# Altium PCB PCB1.PcbDoc
Units mm, origin at the board's own origin, x right, y up, seen from the top; angles counter-clockwise.
Board outline 50.27 x 50.25 mm, 2 copper layers (Top Layer, Bottom Layer); 40 components, 30 nets, 175 pads, 126 vias.
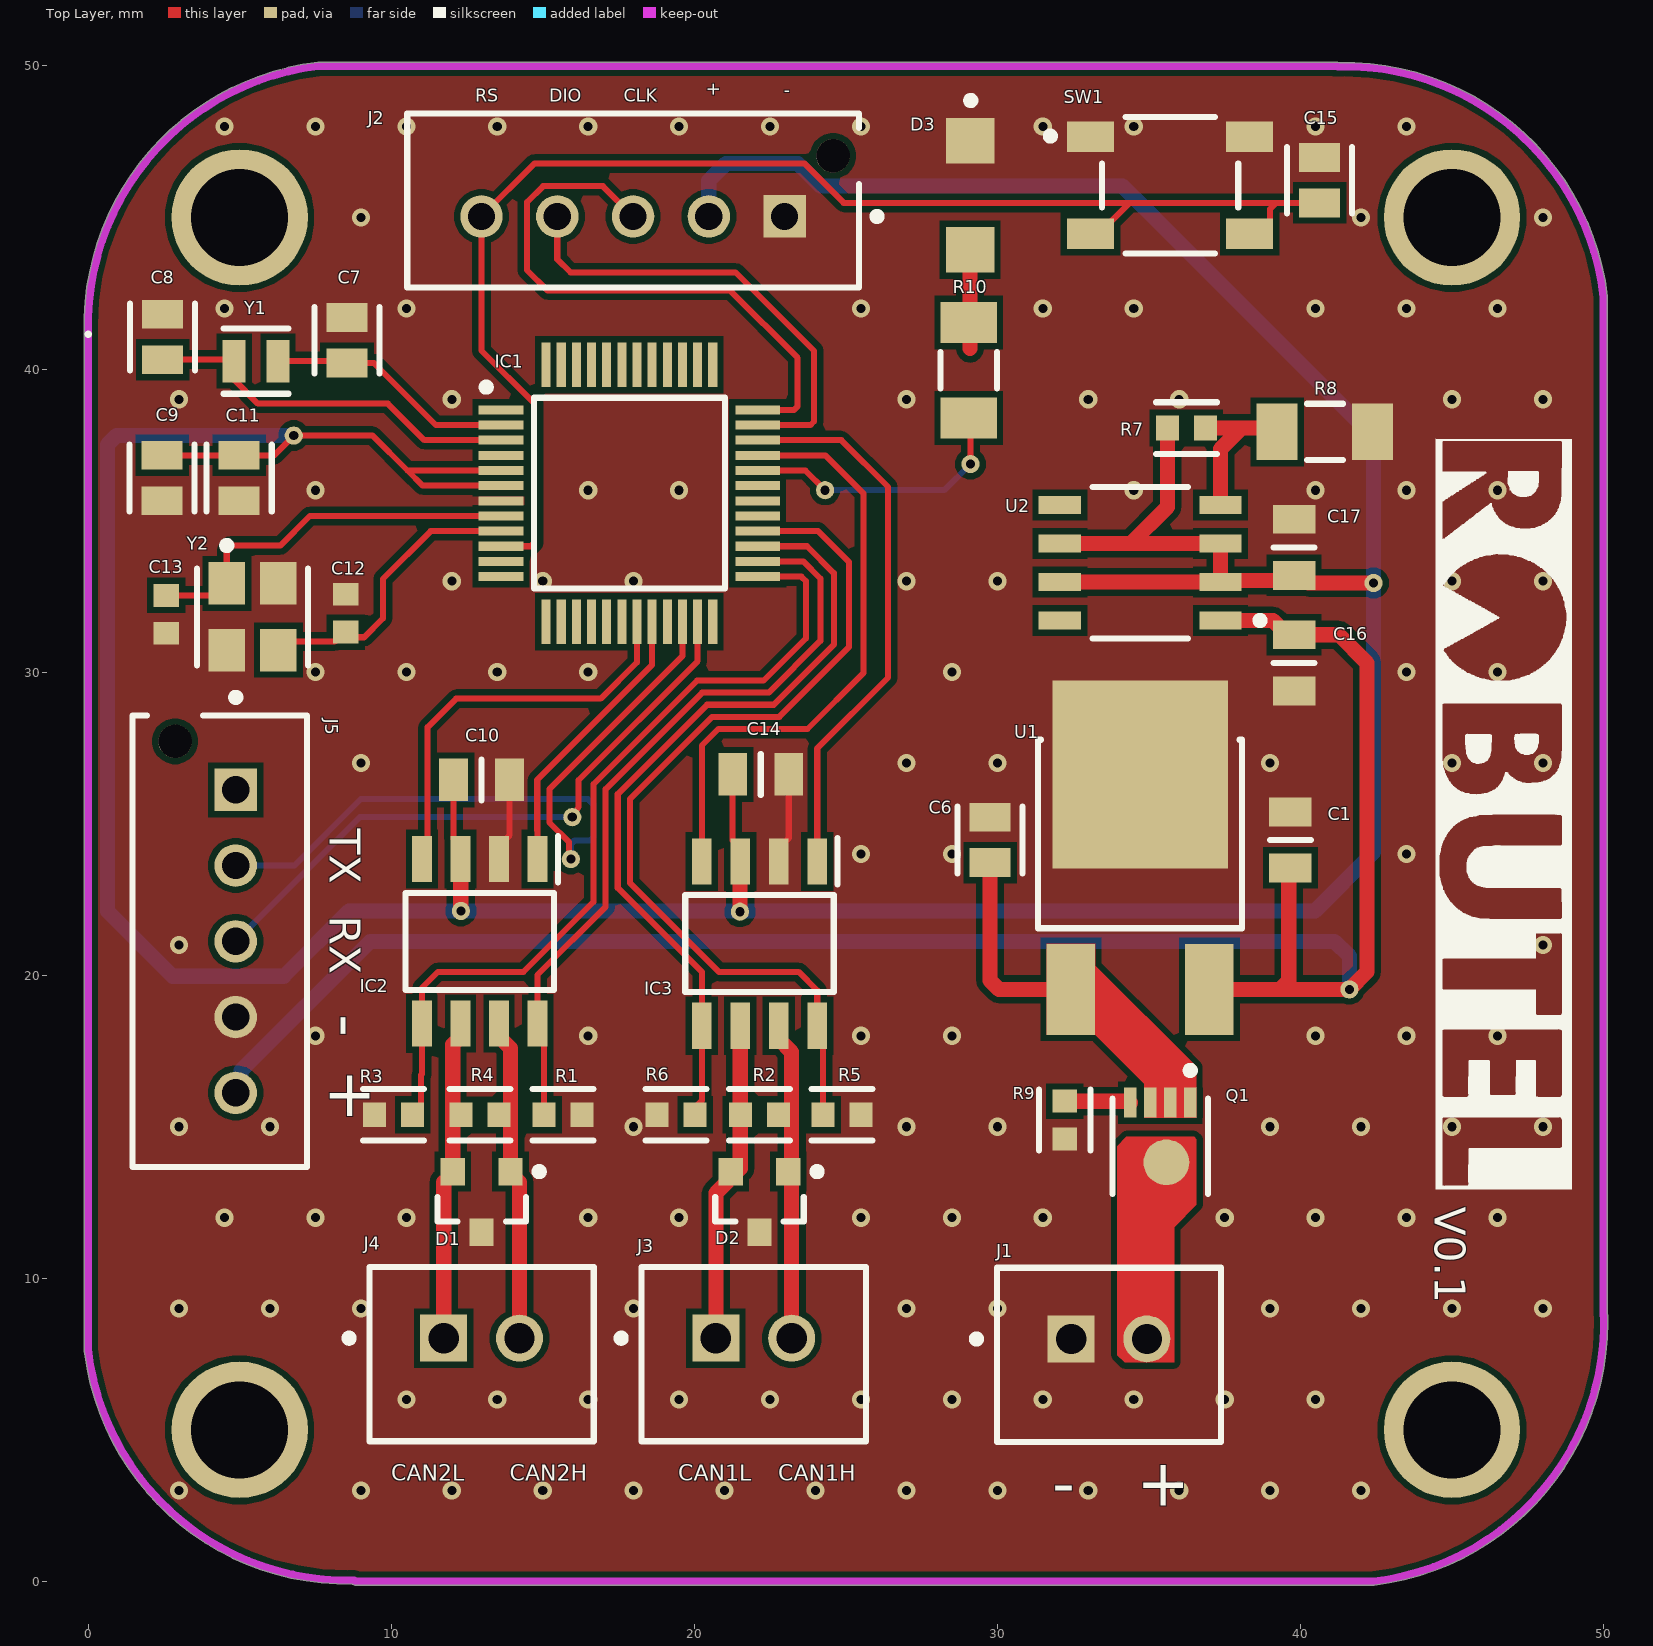
[diagram p0: Top Layer view]
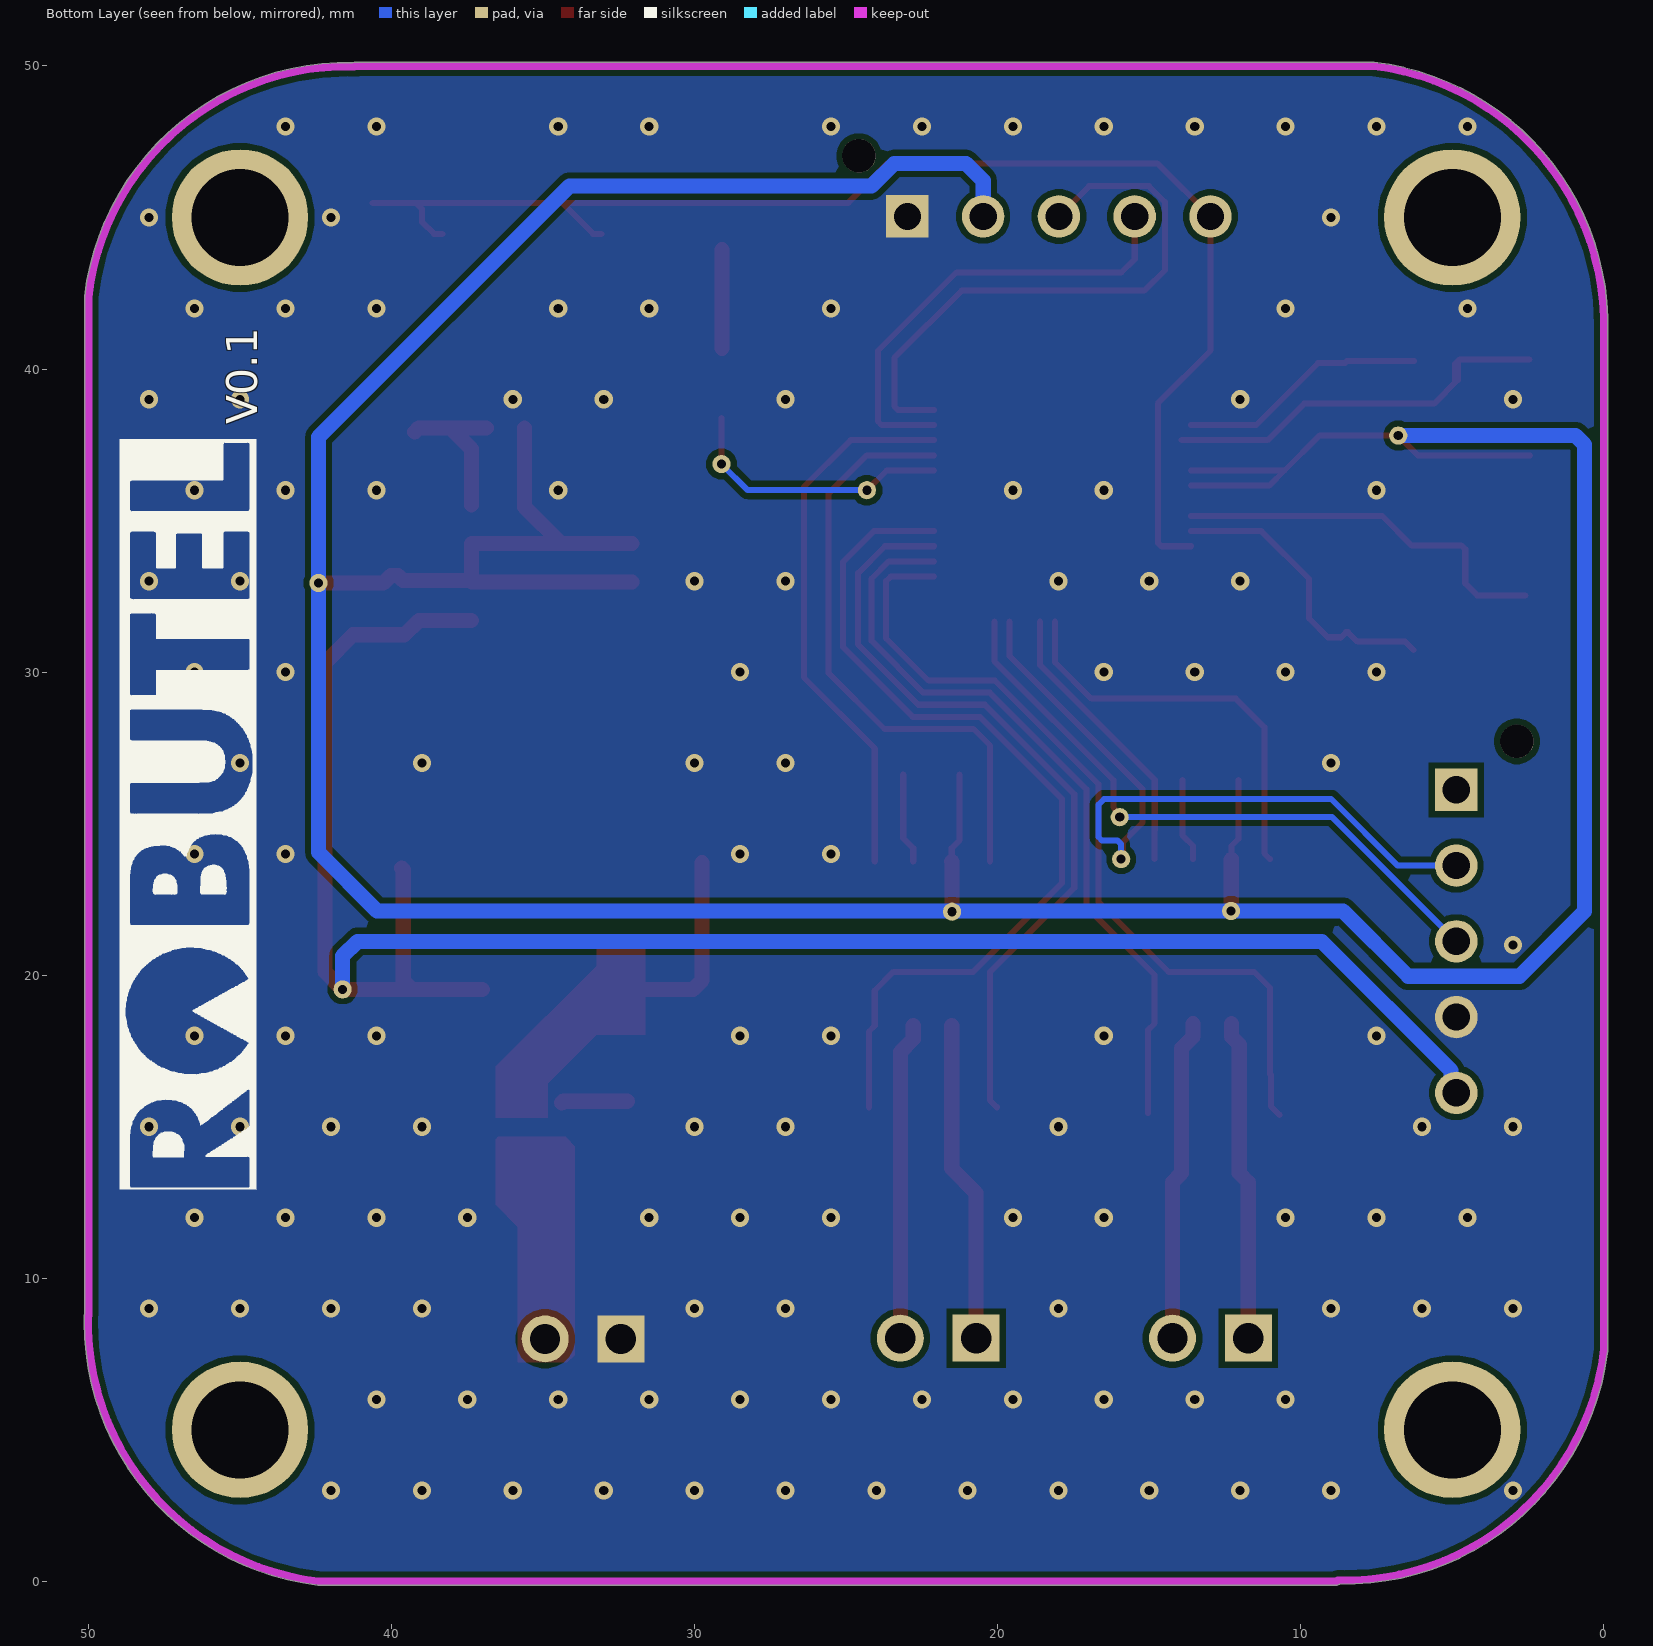
[diagram p1: Bottom Layer view, seen from below]
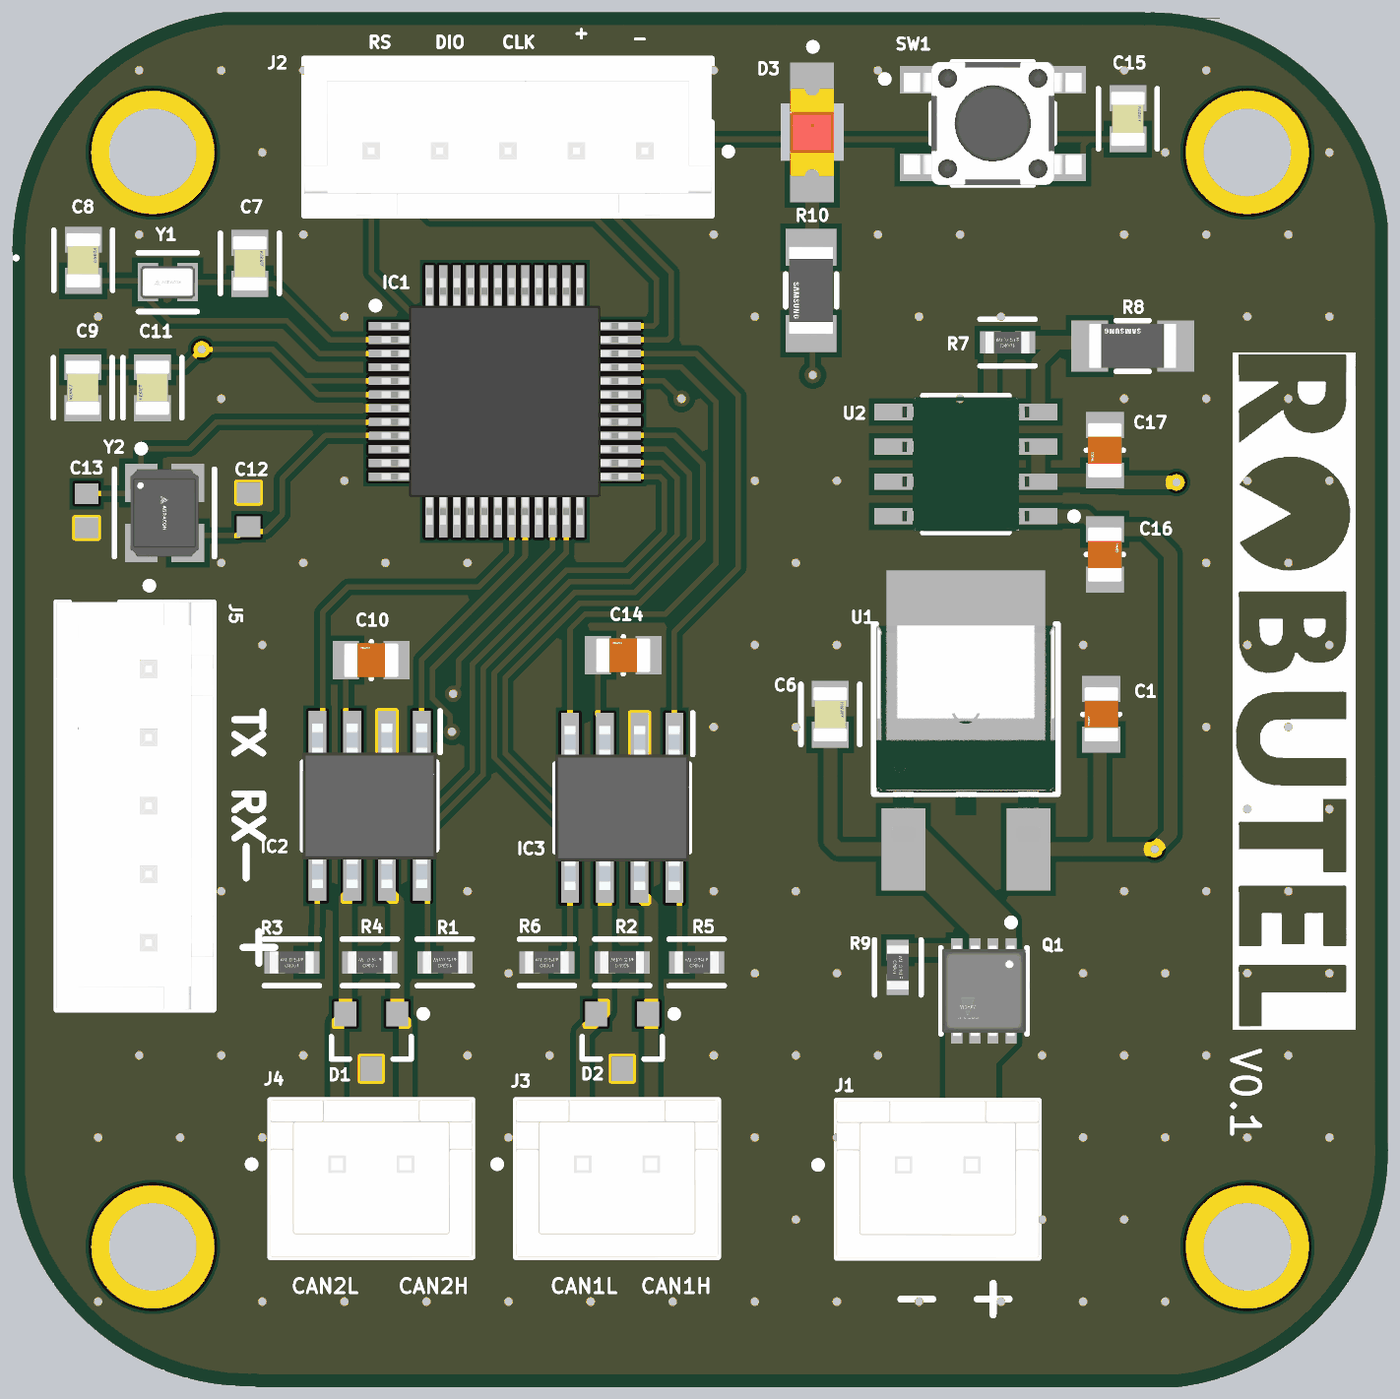
[diagram p2: 3D render of the assembled board from above, using the file's embedded part models]

## Layer stack, top to bottom
Top Solder: solder mask 0.0102, Solder Resist, Dk 3.5
Top Layer: signal copper 0.0356
Dielectric 1: dielectric 0.32, FR-4, Dk 4.8
Bottom Layer: signal copper 0.0356
Bottom Solder: solder mask 0.0102, Solder Resist, Dk 3.5

## Board outline
-0.127,7.58 -0.127,41.144 -0.125,41.218 cw(c8.604,41.449) 7.585,50.121 7.601,50.122 41.227,50.122 41.279,50.111 cw(c41.454,41.38) 50.127,42.4 50.127,42.385 50.127,8.821 50.137,8.777 cw(c41.407,8.546) 50.14,8.546 cw(c41.407,8.546) 42.427,-0.127 42.412,-0.127 8.811,-0.127 8.722,-0.091 cw(c8.546,8.64)

## Design rules (kind name [scope] priority, off if disabled: settings)
Clearance [All] p1: gap=0.2 ignorepadtopadclearanceinfootprint=FALSE
PolygonConnect PolygonConnect_5 [All vs IsNamedPolygon('Bottom Layer-GND 1')] p1: connectstyle=Direct reliefconductorwidth=0.254 reliefentries=4 polygonreliefangle="90 Angle" airgapwidth=0.254
PolygonConnect PolygonConnect_4 [All vs IsNamedPolygon('Top Layer-GND 1')] p2: connectstyle=Direct reliefconductorwidth=0.254 reliefentries=4 polygonreliefangle="90 Angle" airgapwidth=0.254
PolygonConnect PolygonConnect_3 [All vs IsNamedPolygon('Bottom Layer-GND')] p3: connectstyle=Direct reliefconductorwidth=0.254 reliefentries=4 polygonreliefangle="90 Angle" airgapwidth=0.254
PolygonConnect PolygonConnect_2 [All vs IsNamedPolygon('Top Layer-GND')] p4: connectstyle=Direct reliefconductorwidth=0.254 reliefentries=4 polygonreliefangle="90 Angle" airgapwidth=0.254
PolygonConnect PolygonConnect_1 [All vs IsNamedPolygon('Top Layer-GND')] p5: connectstyle=Direct reliefconductorwidth=0.254 reliefentries=4 polygonreliefangle="90 Angle" airgapwidth=0.254
PolygonConnect [All] p6: connectstyle=Relief reliefconductorwidth=0.254 reliefentries=4 polygonreliefangle="90 Angle" airgapwidth=0.254
RoutingVias [All] p1: holewidth=0.711 width=1.27 viastyle="Through Hole" minholewidth=0.711 minwidth=1.27 maxholewidth=0.711 maxwidth=1.27
SolderMaskExpansion [All] p1: expansion=0.102 istentingtop=FALSE
SupplyNets "Schematic Supply Nets_2" [InNet('+5')] p1: voltage=0.000
SupplyNets "Schematic Supply Nets_1" [InNet('GND')] p2: voltage=0.000
SupplyNets "Schematic Supply Nets" [InNet('VDD')] p3: voltage=0.000
Width [All] p1: maxlimit=1 minlimit=0.2 preferedwidth=0.5 minimp=50.000000 maximp=50.000000 favimp=50.000000
30 further rules are at their usual default settings.

## Components (designator, comment, footprint, x,y, rotation, side; value= is the part's Value field where it differs from the comment)
C1 "CC0805KRX7R5BB104" FP-CC0805-EA-MFG 39.666,24.464 r90 top
C6 "C0805C104K5RACTU" FP-C0805C-DN-MFG 29.76,24.464 r270 top value="0.10 μF"
C7 "C0805C519D3HACTU" FP-C0805C-DN-MFG 8.542,40.947 r270 top value="5.1 pF"
C8 "C0805C519D3HACTU" FP-C0805C-DN-MFG 2.456,41.059 r270 top value="5.1 pF"
C9 "C0805C104K5RACTU" FP-C0805C-DN-MFG 2.44,36.402 r90 top value="0.10 μF"
C10 "CC0805KRX7R5BB104" FP-CC0805-EA-MFG 12.983,26.443 r0 top
C11 "C0805C104K5RACTU" FP-C0805C-DN-MFG 4.985,36.402 r90 top value="0.10 μF"
C12 "GRM1885C1H100JA01D" CAPC1608X90X35LL10T15 8.5,31.946 r270 top
C13 "GRM1885C1H100JA01D" CAPC1608X90X35LL10T15 2.58,31.906 r90 top
C14 "CC0805KRX7R5BB104" FP-CC0805-EA-MFG 22.193,26.623 r0 top
C15 "C0805C104K5RACTU" FP-C0805C-DN-MFG 40.633,46.231 r270 top value="0.10 μF"
C16 "CC0805KRX7R5BB104" FP-CC0805-EA-MFG 39.793,30.306 r270 top
C17 "CC0805KRX7R5BB104" FP-CC0805-EA-MFG 39.793,34.116 r90 top
D1 "SZMMBZ27VCLT1G" ONSC-SOT-23-3-318-08_V 12.983,12.518 r270 top
D2 "SZMMBZ27VCLT1G" ONSC-SOT-23-3-318-08_V 22.153,12.518 r270 top
D3 "LTST-C230EKT" FP-LTST-C230EKT-MFG 29.098,45.735 r270 top
IC1 "STM32G0B1CBT6TR" QFP50P900X900X160-48N 17.86,35.902 r0 top
IC2 "TCAN3414DR" SOIC127P600X175-8N 12.921,21.117 r270 top
IC3 "TCAN3414DR" SOIC127P600X175-8N 22.153,21.043 r270 top
J1 "B2B-XH-A(LF)(SN)" FP-B2B-XH-A_LF_SN-MFG 33.686,7.473 r0 top
J2 "B5B-XH-AM(LF)(SN)" FP-B5B-XH-AM_LF_SN-MFG 17.98,45.56 r0 top
J3 "B2B-XH-A(LF)(SN)" FP-B2B-XH-A_LF_SN-MFG 21.963,7.498 r0 top
J4 "B2B-XH-A(LF)(SN)" FP-B2B-XH-A_LF_SN-MFG 12.983,7.498 r0 top
J5 "B5B-XH-AM(LF)(SN)" FP-B5B-XH-AM_LF_SN-MFG 4.346,21.117 r90 top
Q1 "SI7113ADN-T1-GE3" FP-S16-2667-SINGLE-MFG 35.375,14.358 r270 top
R1 "CRGCQ0603J10K" FP-CRGCQ0603-IPC_C 15.67,15.396 r180 top value=10KΩ
R2 "CRGCQ0603F120R" FP-CRGCQ0603-IPC_C 22.153,15.396 r180 top value=120Ω
R3 "CRGCQ0603J10K" FP-CRGCQ0603-IPC_C 10.081,15.396 r180 top value=10KΩ
R4 "CRGCQ0603F120R" FP-CRGCQ0603-IPC_C 12.931,15.396 r180 top value=120Ω
R5 "CRGCQ0603J10K" FP-CRGCQ0603-IPC_C 24.874,15.396 r180 top value=10KΩ
R6 "CRGCQ0603J10K" FP-CRGCQ0603-IPC_C 19.402,15.396 r180 top value=10KΩ
R7 "CRGCQ0603F1K2" FP-CRGCQ0603-IPC_C 36.237,38.053 r180 top value=1.2KΩ
R8 "RC3216J202CS" FP-RC3216-IPC_A 40.809,37.926 r180 top
R9 "CRGCQ0603F1K2" FP-CRGCQ0603-IPC_C 32.226,15.216 r90 top value=1.2KΩ
R10 "RC3216J202CS" FP-RC3216-IPC_A 29.056,39.959 r270 top
SW1 "PTS647SK38SMTR2LFS" FP-PTS647SK38SMTR2LFS-MFG 35.698,46.06 r0 top
U1 "MC7805CDTRKG" FP-369C-MFG 34.713,23.833 r0 top
U2 "LM317LD13TR" FP-SO-8-0016023-MFG 34.713,33.608 r180 top
Y1 "ABS06-32.768KHZ-9-1-T" FP-ABS06-MFG 5.542,40.259 r0 top
Y2 "ABM8G-24.000MHZ-B4Y-T" FP-ABM8G-MFG 5.425,31.826 r270 top

## Footprints (in the part's own frame and the unit in brackets; to place one, negate y for a bottom-side part, rotate by r counter-clockwise, add the part's x,y. Pads: shape width x height; smd on the part's side, far side on the other; paste and mask are expansions set on the pad)
CAPC1608X90X35LL10T15 [mm] "Chip Capacitor, 2-Leads, Body 1.60x0.80mm, IPC High Density"
  rect 0.75x0.85 smd: 1(-0.625,0) 2(0.625,0)
  body extent -0.85,-0.45 0.85,0.45, height 0.9
FP-369C-MFG [mm]
  rect 1.6x3 smd paste+0 mask+0: 1(-2.285,-4.3) 3(2.285,-4.3)
  rect 5.8x6.2 smd paste+0 mask+0: 4(0,2.79)
  silkscreen extent -3.36,-2.28 3.36,3.94, body extent -3.46,-5.9 3.46,5.99, height 0.25
FP-ABM8G-MFG [mm]
  rect 1.4x1.2 smd paste+0 mask+0: 1(-1.1,-0.85) 2(1.1,-0.85) 3(1.1,0.85) 4(-1.1,0.85)
  silkscreen extent -2.47,-1.83 1.6,1.83, body extent -1.9,-1.55 1.9,1.55, height 0.25
FP-ABS06-MFG [mm]
  rect 0.75x1.4 smd paste+0 mask+0: 1(-0.725,0) 2(0.725,0)
  silkscreen extent -1.07,-1.07 1.07,1.07, body extent -1.2,-0.8 1.2,0.8, height 0.25
FP-B2B-XH-A_LF_SN-MFG [mm]
  rect 1.55x1.55 hole 1 paste-2539.97 mask+0: 1(-1.25,0.525)
  round 1.55 hole 1 paste-2539.97 mask+0: 2(1.25,0.525)
  silkscreen extent -4.5,-2.88 3.7,2.88, body extent -3.8,-2.98 3.8,2.98, height 0.25
FP-B5B-XH-AM_LF_SN-MFG [mm]
  rect 1.4x1.4 hole 0.9 paste-2539.97 mask+0: 1(5,-0.525)
  round 1.4 hole 0.9 paste-2539.97 mask+0: 2(2.5,-0.525) 3(0,-0.525) 4(-2.5,-0.525) 5(-5,-0.525)
  round 1.1 hole 1.1 unplated paste-2539.97 mask+0: ""(6.6,1.475)
  silkscreen extent -7.45,-2.88 8.18,2.88, body extent -7.55,-2.98 7.55,2.98, height 0.25
FP-C0805C-DN-MFG [mm]
  rect 0.95x1.35 smd paste+0 mask+0: 1(-0.75,0) 2(0.75,0)
  silkscreen extent -1.1,-1.07 1.1,1.07, body extent -1.4,-0.85 1.4,0.85, height 0.25
FP-CC0805-EA-MFG [mm]
  rect 0.95x1.4 smd paste+0 mask+0: 1(-0.925,0) 2(0.925,0)
  silkscreen extent 0,-0.67 0,0.67, body extent -1.73,-1.17 1.73,1.17, height 0.25
FP-CRGCQ0603-IPC_C [mm]
  rect 0.758x0.812 smd paste+0 mask+0: 1(-0.627,0) 2(0.627,0)
  silkscreen extent -1.01,-0.85 1.01,0.85, body extent -0.8,-0.4 0.8,0.4, height 0.55
FP-LTST-C230EKT-MFG [mm]
  rect 1.5x1.6 smd paste+0 mask+0: 1(-1.8,0) 2(1.8,0)
  silkscreen extent -3.25,-0.1 -3,0.15, body extent -2.65,-0.95 2.65,0.95, height 0.25
FP-PTS647SK38SMTR2LFS-MFG [mm]
  rect 1.55x1 smd paste+0 mask+0: 1(-2.625,1.6) 2(2.625,1.6) 3(-2.625,-1.6) 4(2.625,-1.6)
  silkscreen extent -4.07,-2.25 2.25,2.25, body extent -3.5,-2.35 3.5,2.35, height 0.25
FP-RC3216-IPC_A [mm]
  rect 1.355x1.858 smd paste+0 mask+0: 1(-1.576,0) 2(1.576,0)
  silkscreen extent -0.6,-0.93 0.6,0.93, body extent -2.75,-1.43 2.75,1.43, height 0.25
FP-S16-2667-SINGLE-MFG [mil]
  rect 39x16 smd paste+0 mask+0: 1(-56.5,39) 2(-56.5,13) 3(-56.5,-13) 4(-56.5,-39)
  round 59.4 smd paste+0 mask+0: 5-6-7-8(21,8)
  Top Layer region: -12,44 46,44 46,47 76,47 76,31 56,31 56,21 76,21 76,5 56,5 56,-5 76,-5 76,-21 56,-21 56,-31 76,-31 76,-47 46,-47 46,-44 -12,-44
  silkscreen extent -103,-62 62,62, body extent -80,-71 80,71, height 10
FP-SO-8-0016023-MFG [mm]
  rect 1.4x0.6 smd paste+0 mask+0: 1(-2.65,1.905) 2(-2.65,0.635) 3(-2.65,-0.635) 4(-2.65,-1.905) 5(2.65,-1.905) 6(2.65,-0.635) 7(2.65,0.635) 8(2.65,1.905)
  silkscreen extent -4.08,-2.5 1.58,2.5, body extent -3.45,-2.6 3.45,2.6, height 0.25
ONSC-SOT-23-3-318-08_V [mm] "SOT23, 3-Leads, Body 2.92x1.3mm, Pitch 0.95mm"
  rect 0.9x0.8 smd: 1(-1,0.95) 2(-1,-0.95) 3(1,0)
  silkscreen extent -1.12,-1.46 0.65,2.03, body extent -0.65,-1.46 0.65,1.46, height 1.11
QFP50P900X900X160-48N [mm]
  rect 1.475x0.3 smd: 1(-4.238,2.75) 2(-4.238,2.25) 3(-4.238,1.75) 4(-4.238,1.25) 5(-4.238,0.75) 6(-4.238,0.25) 7(-4.238,-0.25) 8(-4.238,-0.75) 9(-4.238,-1.25) 10(-4.238,-1.75) 11(-4.238,-2.25) 12(-4.238,-2.75) 25(4.238,-2.75) 26(4.238,-2.25) 27(4.238,-1.75) 28(4.238,-1.25) 29(4.238,-0.75) 30(4.238,-0.25) 31(4.238,0.25) 32(4.238,0.75) 33(4.238,1.25) 34(4.238,1.75) 35(4.238,2.25) 36(4.238,2.75)
  rect 0.3x1.475 smd: 13(-2.75,-4.238) 14(-2.25,-4.238) 15(-1.75,-4.238) 16(-1.25,-4.238) 17(-0.75,-4.238) 18(-0.25,-4.238) 19(0.25,-4.238) 20(0.75,-4.238) 21(1.25,-4.238) 22(1.75,-4.238) 23(2.25,-4.238) 24(2.75,-4.238) 37(2.75,4.238) 38(2.25,4.238) 39(1.75,4.238) 40(1.25,4.238) 41(0.75,4.238) 42(0.25,4.238) 43(-0.25,4.238) 44(-0.75,4.238) 45(-1.25,4.238) 46(-1.75,4.238) 47(-2.25,4.238) 48(-2.75,4.238)
  silkscreen extent -4.85,-3.15 3.15,3.62, body extent -4.5,-4.5 4.5,4.5, height 1.41
SOIC127P600X175-8N [mm]
  rect 1.525x0.65 smd: 1(-2.712,1.905) 2(-2.712,0.635) 3(-2.712,-0.635) 4(-2.712,-1.905) 5(2.712,-1.905) 6(2.712,-0.635) 7(2.712,0.635) 8(2.712,1.905)
  silkscreen extent -3.47,-2.45 1.6,2.58, body extent -3,-2.45 3,2.45, height 1.75

## Part data
C1 C10 C14 C16 C17: library part CMP-03422-000810-2, "CAP CER X7R 0805", RoHS Compliant=Yes
C6 C9 C11 C15: library part CMP-2007-00279-2, "CAP CER 0.1UF 50V X7R 0805", Capacitance="0.10 μF", Manufacturer=KEMET, Package=C0805C-DN, Temperature="-55°C to +125°C", Temperature Characteristic=X7R, Temperature Coefficient=30ppm/°C, Temperature Range High=+125°C, Temperature Range Low=-55°C, Tolerance=0.1, Voltage Rating="50 V", Automotive=No, Category=Cap, ComponentLink2Description=Datasheet, ComponentLink2URL=https://content.kemet.com/datasheets/KEM_C1003_C0G_SMD.pdf, Device Class L1="Passive Components", Device Class L2=Capacitors, Device Class L3="Ceramic Capacitors", Digikey Description="CAP CER 0.1UF 50V X7R 0805", Height=0.88mm, Ipc Land Pattern Name=CAPC200125X78, Lead Free=Yes, Manufacturer Part Number=C0805C104K5RACTU, Material=Ceramic, Mouser Description="Cap Ceramic 0.1uF 50V X7R 10% SMD 2.0 x 1.2 mm 125 C Paper T/R", Octopart=https://octopart.com/c0805c104k5ractu-kemet-143926, RoHS=TRUE
C7 C8: library part CMP-03020-033346-1, "C0805 5.1 pF X8R 30ppm/°C 0.5 pF 25 V", Capacitance="5.1 pF", Manufacturer=KEMET, Package=C0805C-DN, Temperature="-55°C to +125°C", Temperature Characteristic=X8R, Temperature Coefficient=30ppm/°C, Temperature Range High=+125°C, Temperature Range Low=-55°C, Tolerance="0.5 pF", Voltage Rating="25 V", Automotive=No, Category=Cap, ComponentLink2Description=Datasheet, ComponentLink2URL=https://content.kemet.com/datasheets/KEM_C1003_C0G_SMD.pdf, Device Class L1="Passive Components", Device Class L2=Capacitors, Device Class L3="Ceramic Capacitors", Height=0.88mm, Ipc Land Pattern Name=CAPC200125X78, Lead Free=Yes, Manufacturer Part Number=C0805C519D3HACTU, Material=Ceramic, Octopart=https://octopart.com/c0805c519d3hactu-kemet-88727353, RoHS=TRUE
C12 C13: library part CMP-2006-02592-1, Manufacturer=Murata, Part Number=GRM1885C1H100JA01D
D1 D2: library part CMP-1060-01002-1, "40 W Peak Power Zener Transient Voltage Suppressor, Dual Common Cathode Zeners for ESD Protection, 3-Pin SOT-23, Pb-Free, Tape and Reel", Manufacturer="On Semiconductor", ComponentLink1Description="Manufacturer URL", ComponentLink1URL=http://www.onsemi.com/, ComponentLink2Description=Datasheet, ComponentLink2URL=http://www.onsemi.cn/pub_link/Collateral/MMBZ15VDLT1-D.PDF, ComponentLink3Description="Package Specification", ComponentLink3URL=http://www.onsemi.cn/pub_link/Collateral/318-08.PDF, DatasheetVersion="Rev. 12", Mounting Technology="Surface Mount", PackageDescription="3-Pin Small Outline Transistor, Body 2.92 x 1.3 mm, Pitch 0.95 mm", PackageReference=SOT-23-3-318-08, PackageVersion="Rev. AP, 11/2009", Packing="Tape and Reel", PartNumber=SZMMBZ27VCLT1G, RoHS=Pb-Free, VZ Typ (V)=27
D3: library part CMP-22017-000030-1, "LED RED CLEAR CHIP SMD", Case Code (Imperial)=1206, Case Code (Metric)=3216, Color=Red, Forward Current=30mA, Forward Voltage=2V, Lens Color=Colorless, Max Operating Temperature=85°C, Min Operating Temperature=-55°C, Package Quantity=1, Power Dissipation=100mW, Reverse Voltage=5V, Test Current=10mA, Case/Package=1206, Depth=1.6mm, Dominant Wavelength=621nm, Height=1.1mm, Illumination Color=Red, Lead Free="Lead Free", Length=3.2mm, Lens Style=Diffused, Lens Transparency=Clear, Luminous Intensity=6mcd, Mount="Surface Mount", Number of Elements=1, Number of LEDs=1, Number of Pins=2, Packaging="Tape and Reel", Power Rating=100mW, Radiation Hardening=No, Viewing Angle=130°, Wavelength=630nm, Width=1.6mm
IC1: "Integrated Circuit", Manufacturer_Name=STMicroelectronics, Mouser Part Number=511-STM32G0B1CBT6TR, Arrow Part Number=STM32G0B1CBT6TR, Arrow Price/Stock=https://www.arrow.com/en/products/stm32g0b1cbt6tr/stmicroelectronics?utm_currency=USD&region=nac, Datasheet Link=https://www.st.com/resource/en/datasheet/stm32g0b1cc.pdf, Height=1.6mm, Manufacturer_Part_Number=STM32G0B1CBT6TR, Mouser Price/Stock=https://www.mouser.co.uk/ProductDetail/STMicroelectronics/STM32G0B1CBT6TR?qs=HoCaDK9Nz5cqFCA6TLpp%252Bw%3D%3D
IC2 IC3: "Integrated Circuit", Manufacturer_Name="Texas Instruments", Mouser Part Number=595-TCAN3414DR, Arrow Part Number=TCAN3414DR, Arrow Price/Stock=https://www.arrow.com/en/products/tcan3414dr/texas-instruments?utm_currency=USD&region=nac, Datasheet Link=https://www.ti.com/lit/ds/symlink/tcan3414.pdf?ts=1713723144569&ref_url=https%253A%252F%252Fwww.mouser.ch%252F, Height=1.75mm, Manufacturer_Part_Number=TCAN3414DR, Mouser Price/Stock=https://www.mouser.co.uk/ProductDetail/Texas-Instruments/TCAN3414DR?qs=mELouGlnn3egF2AojRJddw%3D%3D
J1 J3 J4: library part CMP-2000-05888-3, "CONN HEADER VERT 2POS 2.5MM", Color=Natural, Contact Resistance=20mR, Current Rating=3A, Housing Color=White, Insulation Resistance=1GR, Max Operating Temperature=85°C, Max Voltage Rating (AC)=250V, Min Operating Temperature=-25°C, Connector Type="Male Pin", Contact Material=Brass, Contact Plating=Tin, Contact Type="Male Pin", Depth=5.75mm, Fastening Type=Detent, Housing Material=Polyamide, Lead Free="Lead Free", Lead Pitch=2.5mm, Length=7.4mm, Max Current Rating=3A, Max Voltage Rating (DC)=250V, Mount="Through Hole", Number of Contacts=2, Number of Positions=2, Number of Rows=1, Orientation=Straight, Packaging=Bulk, Pitch=2.5mm, REACH SVHC="No SVHC", Series=XH, Termination=Solder, Voltage Rating=250V, Voltage Rating (AC)=250V, Wire/Cable Gauge=22AWG
J2 J5: library part CMP-17439-000304-1, "CONN HEADER VERT 5POS 2.5MM", Color=Green, Contact Resistance=20mR, Flammability Rating="UL94 V-0", Housing Color=White, Insulation Color=Natural, Max Current Rating=3A, Max Operating Temperature=85°C, Max Voltage Rating (AC)=250V, Min Operating Temperature=-25°C, Connector Type=Header, Contact Finish - Mating=TIN, Contact Material=Brass, Contact Plating=Copper, Contact Shape=Square, Contact Type="Male Pin", Depth=5.75mm, Fastening Type=Detent, Housing Material=Polyamide, Insulation Material=Nylon, Lead Free="Lead Free", Length=14.9mm, Mated Stacking Heights=9.8mm, Mount="Through Hole", Number of Positions=5, Number of Rows=1, Orientation=Straight, Packaging=Bulk, Pitch=2.5mm, Series=XH, Termination=Solder, Voltage Rating=250V
Q1: library part CMP-02550-000064-1, "MOSFET P-CH 100V 10.8A 1212-8", Continuous Drain Current=-3.8A, Drain To Source Breakdown Voltage=-100V, Drain To Source Resistance=0.11Ω, Gate To Source Voltage=20V, Input Capacitace At Vds="515pF @ -50V", Manufacturer=Vishay, Max Forward Diode Voltage=-1.2V, Max Junction Temp=+150°C, Package=S16-2667-SINGLE, Power Dissipation=3.5W, Pulse Drain Current=-20A, Temperature="-55°C to +150°C", Temperature Range Low=-55°C, Typ Forward Diode Voltage=-0.8V, Automotive=No, Category=Trans, ComponentLink2Description=Datasheet, ComponentLink2URL=http://www.vishay.com/docs/77678/si7113adn.pdf, Depletion Mode=False, Device Class L1="Discrete Semiconductors", Device Class L2=Transistors, Device Class L3=MOSFETs, Digikey Description="MOSFET P-CH 100V 10.8A 1212-8", Drain To Source Voltage=-100V, Footprint Url=https://www.vishay.com/docs/72597/72597.pdf, Gate Charge At Vgs="10.9nC @ -10V", Height=1.17mm, Lead Free=Yes, Manufacturer Part Number=SI7113ADN-T1-GE3, Number of Channels=1, Number Of P Channels=1, Octopart=https://octopart.com/si7113adn-t1-ge3-vishay-88182558, Reverse Recovery Charge=80nC, Reverse Recovery Time=43ns, RoHS=TRUE, Rthja Max=36°C/W, Standoff Height=0mm, Temperature Range High=+150°C, Threshold Vgs Max=-2.6V, Threshold Vgs Min=-1.1V, Transconductance=8S, Turn Off Delay Time=20ns, Turn On Delay Time=10ns
R1 R3 R5 R6: library part CMP-03211-009884-1, "CRGCQ 0603 10K 5%", Ambient Temperature Range High=+70°C, Manufacturer="TE Connectivity", Package=CRGCQ0603, Power Rating=0.1W, Resistance=10KΩ, Temperature="-55°C to +155°C", Temperature Coefficient=±100ppm/°C, Temperature Range High=+155°C, Temperature Range Low=-55°C, Tolerance=0.05, Voltage Rating=75V, Category=Res, ComponentLink2Description=Datasheet, ComponentLink2URL=https://www.te.com/commerce/DocumentDelivery/DDEController?Action=showdoc&DocId=Data+Sheet%7F1773204-3%7F1%7Fpdf%7FEnglish%7FENG_DS_1773204-3_1.pdf%7F4-2176339-923, Composition="Thick Film", Device Class L1="Passive Components", Device Class L2=Resistors, Device Class L3="Chip SMD Resistors", Digikey Description="CRGCQ 0603 10K 5%", Height=0.55mm, Ipc Land Pattern Name=RESC16080X45, Lead Free=Yes, Manufacturer Part Number=CRGCQ0603J10K, Mouser Description="Res Thick Film 0603 10K Ohm 5% 0.1W(1/10W) ±100ppm/C Pad SMD Automotive T/R", Octopart=https://octopart.com/crgcq0603j10k-te+connectivity-91018097, RoHS=TRUE, Series=CRGCQ
R2 R4: library part CMP-03211-001601-1, "CRGCQ0603 120Ω 1% ±100ppm/°C 75V", Ambient Temperature Range High=+70°C, Manufacturer="TE Connectivity", Package=CRGCQ0603, Power Rating=0.1W, Resistance=120Ω, Temperature="-55°C to +155°C", Temperature Coefficient=±100ppm/°C, Temperature Range High=+155°C, Temperature Range Low=-55°C, Tolerance=0.01, Voltage Rating=75V, Category=Res, ComponentLink2Description=Datasheet, ComponentLink2URL=https://www.te.com/commerce/DocumentDelivery/DDEController?Action=showdoc&DocId=Data+Sheet%7F1773204-3%7F1%7Fpdf%7FEnglish%7FENG_DS_1773204-3_1.pdf%7F4-2176339-482, Composition="Thick Film", Device Class L1="Passive Components", Device Class L2=Resistors, Device Class L3="Chip SMD Resistors", Height=0.55mm, Ipc Land Pattern Name=RESC16080X45, Lead Free=Yes, Manufacturer Part Number=CRGCQ0603F120R, Mouser Description="Res, Aec-Q200, Thick Film, 120R, 1%, 0603", Octopart=https://octopart.com/crgcq0603f120r-te+connectivity-91018039, RoHS=TRUE, Series=CRGCQ
R7 R9: library part CMP-03211-000516-1, "CRGCQ 0603 1K2 1%", Ambient Temperature Range High=+70°C, Manufacturer="TE Connectivity", Package=CRGCQ0603, Power Rating=0.1W, Resistance=1.2KΩ, Temperature="-55°C to +155°C", Temperature Coefficient=±100ppm/°C, Temperature Range High=+155°C, Temperature Range Low=-55°C, Tolerance=0.01, Voltage Rating=75V, Category=Res, ComponentLink2Description=Datasheet, ComponentLink2URL=https://www.te.com/commerce/DocumentDelivery/DDEController?Action=showdoc&DocId=Data+Sheet%7F1773204-3%7F1%7Fpdf%7FEnglish%7FENG_DS_1773204-3_1.pdf%7F4-2176339-710, Composition="Thick Film", Device Class L1="Passive Components", Device Class L2=Resistors, Device Class L3="Chip SMD Resistors", Digikey Description="CRGCQ 0603 1K2 1%", Height=0.55mm, Ipc Land Pattern Name=RESC16080X45, Lead Free=Yes, Manufacturer Part Number=CRGCQ0603F1K2, Octopart=https://octopart.com/crgcq0603f1k2-te+connectivity-91018051, RoHS=TRUE, Series=CRGCQ
R8 R10: library part CMP-13261-004107-1, "Res Thick Film 1206 2kΩ 5% 0.25W ±100ppm/°C Molded SMD T/R", Case Code (Imperial)=1206, Case Code (Metric)=3216, Max Operating Temperature=155°C, Max Power Dissipation=250mW, Min Operating Temperature=-55°C, Resistance=2kR, Temperature Coefficient=100ppm/°C, Tolerance=5%, Voltage Rating (DC)=200V, Case/Package=1206, Composition="Thick Film", Contact Plating=Tin, Depth=1.6mm, Features="Moisture Resistant", Height=0.026inch, Lead Free="Lead Free", Length=0.126inch, Number of Terminations=2, Packaging="Tape and Reel", Radiation Hardening=No, Width=0.063inch
SW1: library part CMP-10040-000033-1, "TACT 4.5 X 4.5, 3.8 MM H, 2.5N,", Max Operating Temperature=70°C, Min Operating Temperature=-20°C, Operating Force=250gf, Ratings=IP40, Actuator Type=Standard, Illumination Type=Non-Illuminated, Mechanical Life=100000Cycles, Mount="Surface Mount", Packaging="Tape and Reel", Switch Function=Off-Mom, Switch Travel=0.25mm, Termination="Gull Wing", Throw Configuration=SPST
U1: library part CMP-07128-000033-1, "IC REG LINEAR 5V 1A DPAK", Case/Package=DPAK, Dropout Voltage=2V, Max Input Voltage=35V, Max Operating Temperature=125°C, Max Output Current=1A, Max Output Voltage=5.2V, Min Input Voltage=10V, Min Operating Temperature=0°C, Min Output Voltage=5V, Output Voltage Accuracy=4%, Package Quantity=1, Power Supply Rejection Ratio (PSRR)=83dB, Quiescent Current=3.2mA, Accuracy=4%, Contact Plating=Tin, Halogen Free="Halogen Free", Height=2.38mm, Lead Free="Lead Free", Length=6.73mm, Mount="Surface Mount", Nominal Output Voltage=5V, Number Of Outputs=1, Number of Pins=3, Number of Regulators=1, Output Current=1A, Output Type=Fixed, Output Voltage=5V, Packaging="Tape and Reel", Polarity=Positive, Radiation Hardening=No, REACH SVHC="No SVHC", Width=6.22mm
U2: library part CMP-0244-00272-2, "IC REG LINEAR POS ADJ 100MA 8SO", Case/Package=SO, Max Input Voltage=40V, Max Operating Temperature=125°C, Max Output Current=200mA, Max Output Voltage=37V, Min Input Voltage=4.2V, Min Operating Temperature=0°C, Min Output Voltage=1.2V, Output Current=100mA, Package Quantity=1, Power Supply Rejection Ratio (PSRR)=80dB, Reference Voltage=1.3V, Tolerance=5%, Contact Plating=Tin, Height=1.25mm, Lead Free="Lead Free", Length=5mm, Mount="Surface Mount", Number Of Outputs=1, Number of Pins=8, Number of Regulators=1, Output Type=Adjustable, Output Voltage=37V, Packaging="Tape and Reel", Polarity=Positive, Radiation Hardening=No, REACH SVHC="No SVHC", Weight=0.01787oz, Width=4mm
Y1: library part CMP-27762-003430-2, "Crystal 32.768kHz ±10ppm (Tol) 9pF FUND 90kΩ 2-Pin Mini-CSMD T/R", Case/Package=CSMD, ESR (Equivalent Series Resistance)=90kR, Frequency=32.768kHz, Frequency Tolerance=10ppm, Load Capacitance=9pF, Max Operating Temperature=85°C, Min Operating Temperature=-40°C, Package Quantity=3000, Depth=1.2mm, Height=0.6mm, Length=2mm, Mount="Surface Mount", Number of Pins=2, Packaging="Tape and Reel", Radiation Hardening=No, REACH SVHC="No SVHC", RoHS Compliant=Yes, Series=ABS06, Series Resistance=90kR, Termination=SMD/SMT, Tolerance=10ppm, Width=1.2mm
Y2: library part CMP-27762-015229-1, "Crystal 24MHz ±30ppm (Tol) ±30ppm (Stability) 10pF FUND 60Ω 4-Pin SMD T/R", Case/Package=CSMD, ESR (Equivalent Series Resistance)=60R, Frequency=24MHz, Frequency Stability=30ppm, Load Capacitance=10pF, Max Operating Temperature=70°C, Min Operating Temperature=-20°C, Operating Frequency="24 MHz", Package Quantity=1000, Depth=2.5mm, Frequency Tolerance=30ppm, Height=1mm, Lead Free="Lead Free", Length=3.2mm, Mount="Surface Mount", Number of Pins=4, Packaging="Tape and Reel", Series=ABM8G, Series Resistance=60R, Termination=SMD/SMT, Tolerance=30ppm, Width=2.5mm

## Free pads (board coordinates)
  round 4.5 hole 3.2: 10(5,5) 10(5,45) 10(45,5) 10(45,45)
  round 0.6 hole 0.3: 11(6.785,37.802) 11(12.299,22.119) 11(21.507,22.094) 11(41.615,19.533) 11(42.412,32.94)
  round 0.6 hole 0.3 mask+0.102: 11(15.927,23.829) 11(15.975,25.214) 11(24.318,36.002) 11(29.114,36.864)

## Via types
v1: diameter 0.6, hole 0.3, Top Layer to Bottom Layer, tented both sides, 126 vias

## Nets (pads, with @x,y where several pads share a name; then routed paths per layer and width w, separated by ;. In a path a pad name is that pad's centre, name@x,y a point inside that pad or via, vN(x,y) a via of type N, cw(c..) or ccw(c..) an arc to the next point about the centre after c; other vN are vias at no path point)
+5: C1.1 C16.1 J5.5 pad.11@41.615,19.533 U1.3 U2.1 | length 65.6
  Top Layer w0.5: U1.3 39.323,19.533 ; U2.1 39.096,31.703 39.568,31.231 C16.1 41.268,31.231 42.193,30.306 42.193,20.112 41.615,19.533 39.323,19.533 ; C1.1 39.616,23.489 39.616,19.826 39.323,19.533
  Bottom Layer w0.5: J5.5 5.043,16.289 5.043,16.852 9.308,21.117 41.127,21.117 41.615,20.629 pad.11@41.615,19.533
CANH: D2.1 IC3.7 J3.2 R2.1 | length 10.5
  Top Layer w0.5: IC3.7 22.788,17.894 23.213,17.469 J3.2
CANH2: D1.1 IC2.7 J4.2 R4.1 | length 10.6
  Top Layer w0.5: IC2.7 13.556,17.968 13.933,17.591 D1.1 ; D1.1@13.933,13.468 14.233,13.168 J4.2
CANL: D2.2 IC3.6 J3.1 R2.2 | length 10.6
  Top Layer w0.5: J3.1 20.713,12.818 21.518,13.623 IC3.6
CANL2: D1.2 IC2.6 J4.1 R4.2 | length 10.6
  Top Layer w0.5: J4.1 11.733,13.168 12.033,13.468 D1.2 12.033,17.715 12.286,17.968 IC2.6
GND: C1.2 C6.1 C7.1 C8.1 C9.1 C10.2 C11.1 C12.1 C13.1 C14.2 C15.1 C16.2 C17.2 D1.3 D2.3 D3.1 IC1.7 IC2.2 IC3.2 J1.1 J2.1 J5.4 R1.1 R3.2 R5.1 R6.2 R8.1 R9.1 SW1.1 SW1.2 U1.4 Y2.2 Y2.4 | length 5.8
  Top Layer w0.2: IC2.2 13.556,24.267 13.908,24.619 C10.2 ; IC3.2 22.788,24.193 23.118,24.523 C14.2
  other v1: 3,3 9,3 12,3 15,3 18,3 21,3 24,3 27,3 30,3 33,3 36,3 39,3 42,3 10.5,6 13.5,6 16.5,6 19.5,6 22.5,6 25.5,6 28.5,6 31.5,6 34.5,6 37.5,6 40.5,6 3,9 6,9 9,9 18,9 27,9 30,9 39,9 42,9 45,9 48,9 4.5,12 7.5,12 10.5,12 16.5,12 19.5,12 25.5,12 28.5,12 31.5,12 37.5,12 40.5,12 43.5,12 46.5,12 3,15 6,15 18,15 27,15 30,15 39,15 42,15 45,15 48,15 7.5,18 16.5,18 25.5,18 28.5,18 40.5,18 43.5,18 46.5,18 3,21 45,21 48,21 25.5,24 28.5,24 43.5,24 46.5,24 9,27 27,27 30,27 39,27 45,27 48,27 7.5,30 10.5,30 13.5,30 16.5,30 28.5,30 43.5,30 46.5,30 12,33 15,33 18,33 27,33 30,33 45,33 48,33 7.5,36 16.5,36 19.5,36 34.5,36 40.5,36 43.5,36 46.5,36 3,39 12,39 27,39 33,39 36,39 45,39 48,39 4.5,42 10.5,42 25.5,42 31.5,42 34.5,42 40.5,42 43.5,42 46.5,42 9,45 42,45 48,45 4.5,48 7.5,48 10.5,48 13.5,48 16.5,48 19.5,48 22.5,48 25.5,48 31.5,48 34.5,48 40.5,48 43.5,48
NetC6_2: C6.2 Q1.1 Q1.2 Q1.3 U1.1 | length 6.7
  Top Layer w0.5: C6.2 29.76,19.826 30.053,19.533 U1.1
NetC7_2: C7.2 IC1.2 Y1.2 | length 8.2
  Top Layer w0.2: Y1.2 8.48,40.259 C7.2 9.433,40.197 11.478,38.152 IC1.2
NetC8_2: C8.2 IC1.3 Y1.1 | length 13.6
  Top Layer w0.2: C8.2 4.767,40.309 Y1.1 ; Y1.1@4.907,39.644 4.907,40.169 Y1.1 ; IC1.3@13.935,37.652 11.092,37.652 9.886,38.859 5.602,38.859 4.817,39.644 4.817,40.169 Y1.1
NetC12_2: C12.2 IC1.9 Y2.3 | length 9.9
  Top Layer w0.2: Y2.3 6.555,31.006 8.135,31.006 8.45,31.321 C12.2 8.687,31.134 8.702,31.149 9.108,31.149 9.726,31.768 9.726,33.073 11.305,34.652 13.122,34.652 IC1.9
NetC13_2: C13.2 IC1.8 Y2.1 | length 12.8
  Top Layer w0.2: C13.2 4.18,32.531 Y2.1 4.575,34.059 4.692,34.176 6.345,34.176 7.321,35.152 IC1.8
NetD3_2: D3.2 R10.1 | length 3.3
  Top Layer w0.5: 29.098,40.672 D3.2
NetIC1_18: IC1.32 pad.11@24.318,36.002 pad.11@29.114,36.864 R10.2 | length 9.2
  Top Layer w0.2: IC1.32 23.668,36.652 pad.11@24.318,36.002 ; pad.11@29.114,36.864 R10.2@29.114,38.383
  Bottom Layer w0.2: pad.11@24.318,36.002 28.252,36.002 pad.11@29.114,36.864
NetIC1_19: IC1.19 IC2.4 | length 13.6
  Top Layer w0.2: IC2.4 11.203,24.016 11.203,28.184 12.143,29.124 16.908,29.124 18.11,30.326 IC1.19
NetIC1_20: IC1.20 IC2.1 | length 9.4
  Top Layer w0.2: IC2.1 14.826,24.775 14.82,24.782 14.82,26.446 18.61,30.236 IC1.20
NetIC1_33: IC1.33 IC3.4 | length 20.1
  Top Layer w0.2: IC3.4 20.248,27.578 20.793,28.123 23.737,28.123 25.586,29.973 25.586,35.891 24.325,37.152 IC1.33
NetIC1_34: IC1.34 IC3.1 | length 18.3
  Top Layer w0.2: IC1.34 24.851,37.652 26.393,36.11 26.393,29.821 24.058,27.486 IC3.1
NetJ1_2: J1.2 Q1.5-6-7-8 | length 6.1
  Top Layer w1: J1.2 34.936,13.045 35.578,13.687 Q1.5-6-7-8
NetQ1_4: Q1.4 R9.2 | length 2.2
  Top Layer w0.5: R9.2 34.337,15.843 34.384,15.796 Q1.4
NetR7_1: R7.1 R8.2 U2.4 | length 5.2
  Top Layer w0.5: R7.1 38.056,38.053 ; U2.4 37.363,37.36 38.056,38.053 ; R8.2 39.106,38.053 38.056,38.053
NRST: C15.2 IC1.10 J2.5 SW1.3 SW1.4 | length 44.8
  Top Layer w0.2: IC1.10 14.6,34.152 14.717,34.269 14.717,38.869 12.98,40.606 J2.5 14.73,46.785 23.628,46.785 24.932,45.481 34.369,45.481 ; SW1.3 33.348,44.46 34.369,45.481 ; SW1.4 38.598,44.46 38.998,44.86 38.998,45.281 39.198,45.481 ; C15.2 39.198,45.481 ; 34.369,45.481 39.198,45.481
SHDN1: IC1.27 IC3.5 R6.1 | length 26
  Top Layer w0.2: R6.1@20.029,15.643 20.248,15.863 IC3.5 20.248,20.112 17.476,22.884 17.476,25.976 20.424,28.923 22.622,28.923 24.607,30.908 24.607,33.264 23.72,34.152 IC1.27
SHDN2: IC1.25 IC2.5 R3.1 | length 27.6
  Top Layer w0.2: R3.1@10.708,15.396 10.987,15.675 10.987,16.708 11.016,16.737 IC2.5 11.016,19.584 11.544,20.112 14.366,20.112 16.676,22.422 16.676,26.307 20.092,29.723 22.291,29.723 23.686,31.118 23.686,33 23.534,33.152 IC1.25
STB1: IC1.28 IC3.8 R5.2 | length 29.9
  Top Layer w0.2: IC1.28 24.087,34.652 25.104,33.636 25.104,30.822 22.806,28.523 20.589,28.523 17.876,25.81 17.876,23.05 20.813,20.112 23.442,20.112 24.058,19.496 IC3.8 24.247,18.142 R5.2@24.247,15.643
STB2: IC1.26 IC2.8 R1.2 | length 25.2
  Top Layer w0.2: R1.2@15.043,15.452 15.043,18.188 IC2.8 14.826,20.007 17.076,22.257 17.076,26.141 20.258,29.323 22.456,29.323 24.163,31.03 24.163,33.088 23.6,33.652 IC1.26
SWCLK: IC1.36 J2.3 | length 19.5
  Top Layer w0.2: J2.3 16.98,46.035 15.012,46.035 14.48,45.503 14.48,43.265 15.16,42.585 21.193,42.585 23.411,40.367 23.411,38.769 23.294,38.652 IC1.36
SWDIO: IC1.35 J2.4 | length 15.4
  Top Layer w0.2: J2.4 15.48,43.623 15.918,43.185 21.363,43.185 23.951,40.597 23.951,38.269 23.834,38.152 IC1.35
USART3_RX: IC1.23 J5.3 pad.11@15.975,25.214 | length 20.9
  Top Layer w0.2: pad.11@15.975,25.214 16.18,25.543 16.18,26.435 20.11,30.365 IC1.23
  Bottom Layer w0.2: J5.3 8.968,25.214 pad.11@15.975,25.214
USART3_TX: IC1.22 J5.2 pad.11@15.927,23.829 | length 25.1
  Top Layer w0.2: pad.11@15.927,23.829 15.871,23.885 15.871,24.386 15.22,25.038 15.22,26.14 19.61,30.53 IC1.22
  Bottom Layer w0.2: J5.2 6.805,23.617 9.002,25.814 16.488,25.814 16.676,25.626 16.676,24.559 16.559,24.442 16.045,24.442 15.927,24.325 pad.11@15.927,23.829
VDD: C9.2 C10.1 C11.2 C14.1 C17.1 IC1.5 IC1.6 IC2.3 IC3.3 J2.2 pad.11@6.785,37.802 pad.11@12.299,22.119 pad.11@21.507,22.094 pad.11@42.412,32.94 R7.2 U2.2 U2.3 U2.6 U2.7 | length 152.5
  Top Layer w0.2: C9.2 C11.2 6.135,37.152 6.785,37.802 9.389,37.802 10.539,36.652 ; C10.1 12.058,24.495 12.286,24.267 IC2.3 ; IC1.6 11.039,36.152 10.539,36.652 ; IC1.5 10.539,36.652 ; C14.1 21.268,24.443 21.518,24.193 IC3.3
  Top Layer w0.5: IC2.3 12.293,23.823 12.293,22.126 pad.11@12.299,22.119 ; pad.11@21.507,22.094 21.512,22.1 21.512,23.75 IC3.3 ; U2.7 U2.2 ; U2.6 34.404,34.243 ; R7.2 35.61,35.45 34.404,34.243 ; pad.11@42.412,32.94 40.269,32.94 40.018,33.191 C17.1 39.625,33.023 37.413,33.023 U2.2 ; 34.404,34.243 U2.3 U2.2
  Bottom Layer w0.5: pad.11@6.785,37.802 0.936,37.802 0.643,37.509 0.643,22.11 2.786,19.967 6.453,19.967 8.605,22.119 21.507,22.119 40.476,22.119 42.412,24.054 42.412,32.94 42.412,37.753 34.129,46.035 24.166,46.035 23.416,46.785 21.047,46.785 20.48,46.218 J2.2
pads on no net: IC1.1 IC1.4 IC1.11 IC1.12 IC1.13 IC1.14 IC1.15 IC1.16 IC1.17 IC1.18 IC1.21 IC1.24 IC1.29 IC1.30 IC1.31 IC1.37 IC1.38 IC1.39 IC1.40 IC1.41 IC1.42 IC1.43 IC1.44 IC1.45 IC1.46 IC1.47 IC1.48 J2. J5. J5.1 U2.5 U2.8

## Polygon pours and split planes (outlines as drawn)
GND on Bottom Layer "Bottom Layer-GND 1" (solid, pour order 3): -0.127,7.58 -0.127,41.144 -0.125,41.218 cw(c8.604,41.449) 7.585,50.121 7.601,50.122 41.227,50.122 41.279,50.111 cw(c41.454,41.38) 50.127,42.4 50.127,42.385 50.127,8.821 50.137,8.777 cw(c41.407,8.546) 50.14,8.546 cw(c41.407,8.546) 42.427,-0.127 42.412,-0.127 8.811,-0.127 8.722,-0.091 cw(c8.546,8.64)
GND on Top Layer "Top Layer-GND 1" (solid, pour order 2): -0.127,7.58 -0.127,41.144 -0.125,41.218 cw(c8.604,41.449) 7.585,50.121 7.601,50.122 41.227,50.122 41.279,50.111 cw(c41.454,41.38) 50.127,42.4 50.127,42.385 50.127,8.821 50.137,8.777 cw(c41.407,8.546) 50.14,8.546 cw(c41.407,8.546) 42.427,-0.127 42.412,-0.127 8.811,-0.127 8.722,-0.091 cw(c8.546,8.64)

## Keep-outs
Keep-Out Layer:
  lines w0.254: 0,7.58 0,41.144 ; 0,7.635 ccw(c8.546,8.64) 8.773,0.038 ; 0.002,41.221 cw(c8.604,41.449) 7.6,49.995 41.227,49.995 ; 8.811,0 42.412,0 ccw(c41.407,8.546) 50.009,8.773 ; 41.227,49.982 cw(c41.454,41.38) 50,42.385 50,8.773

## Other copper
Top Layer:
  region net NetC6_2: 31.628,21.033 31.628,18.033 33.228,18.033 33.328,17.933 34.841,16.42 34.841,15.298 36.568,15.298 36.568,16.289 36.555,16.302 36.555,16.989 33.228,20.315 33.228,21.033
  region net NetJ1_2: 33.955,7.466 34.197,7.223 35.831,7.223 35.831,11.691 36.568,12.428 36.568,14.587 36.492,14.663 34.257,14.663 33.955,14.361

## Silkscreen, mask and mechanical layers (free items; w line width, h text height)
Top Overlay:
  region: 47.845,36.195 47.839,36.114 47.829,36.092 47.798,36.048 47.789,36.014 47.758,35.964 47.723,35.929 47.717,35.917 47.695,35.895 47.683,35.889 47.67,35.876 47.639,35.858 47.617,35.836 47.614,35.826 47.583,35.814 47.526,35.808 47.495,35.795 47.47,35.789 47.426,35.783 47.336,35.779 47.255,35.786 47.23,35.792 47.177,35.808 47.139,35.814 47.095,35.845 47.077,35.864 47.052,35.87 47.02,35.889 46.967,35.942 46.955,35.973 46.933,35.995 46.911,36.004 46.905,36.029 46.899,36.079 46.886,36.111 46.874,36.154 46.842,36.235 46.849,36.623 46.858,36.632 47.851,36.626 47.867,36.592 47.861,36.248 47.854,36.229 47.848,36.198
  region: 46.293,27.391 46.287,27.372 46.277,27.325 46.271,27.3 46.265,27.238 46.233,27.188 46.224,27.178 46.218,27.153 46.174,27.097 46.159,27.082 46.146,27.075 46.134,27.063 46.121,27.057 46.084,27.019 46.043,27.01 46.018,27.004 45.984,26.994 45.959,26.988 45.906,26.979 45.827,26.975 45.809,26.982 45.762,26.991 45.721,27.007 45.696,27.013 45.665,27.025 45.643,27.047 45.637,27.06 45.599,27.085 45.571,27.119 45.537,27.153 45.528,27.194 45.481,27.285 45.475,27.31 45.468,27.435 45.462,27.453 45.453,27.506 45.443,27.691 45.44,27.744 45.443,27.834 45.437,27.853 45.443,27.916 45.471,27.95 45.49,27.956 45.515,27.962 46.271,27.956 46.293,27.94 46.305,27.909 46.299,27.441 46.293,27.422 46.293,27.397
  region: 6 vertices and 7 holes, not listed, extent 44.463,12.934 48.96,37.694
  region: 47.074,27.653 47.067,27.697 47.061,27.797 47.067,27.916 47.095,27.95 47.145,27.962 47.239,27.956 47.258,27.962 47.729,27.959 47.789,27.962 47.808,27.956 47.832,27.95 47.861,27.922 47.867,27.859 47.861,27.653 47.854,27.634 47.836,27.566 47.829,27.522 47.82,27.481 47.804,27.46 47.779,27.435 47.751,27.381 47.739,27.375 47.704,27.347 47.689,27.325 47.658,27.313 47.58,27.285 47.545,27.275 47.501,27.269 47.389,27.275 47.333,27.3 47.283,27.313 47.252,27.325 47.217,27.353 47.195,27.375 47.183,27.381 47.167,27.391 47.161,27.403 47.13,27.46 47.105,27.485 47.092,27.534 47.086,27.609 47.074,27.647
  lines w0.254: 0,41.144 0,41.144
  text "-" at 23.16,49.314 h0.42 r180
  text "+" at 20.831,48.979 h0.42 r90
  text "RS" at 12.782,48.825 h0.42
  text "DIO" at 15.22,48.825 h0.42
  text "CLK" at 17.671,48.825 h0.42
  text "TX" at 7.979,24.826 h1.02 r270
  text "RX" at 7.979,21.966 h1.02 r270
  text "-" at 9.004,17.948 h1.52 r90
  text "+" at 7.764,15.354 h1.52
  text "V0.1" at 44.439,12.364 h1.02 r270
  text "CAN2L" at 10,3.32 h0.52
  text "CAN2H" at 13.912,3.32 h0.52
  text "CAN1L" at 19.468,3.32 h0.52
  text "CAN1H" at 22.773,3.32 h0.52
  text "-" at 31.809,2.493 h1.52
  text "+" at 34.599,2.501 h1.52
Bottom Overlay:
  region: 6 vertices and 7 holes, not listed, extent 44.467,12.928 48.965,37.688
  region: 46.297,23.231 46.291,23.25 46.282,23.297 46.276,23.321 46.269,23.384 46.238,23.434 46.229,23.443 46.223,23.468 46.179,23.524 46.163,23.54 46.151,23.546 46.138,23.559 46.126,23.565 46.088,23.603 46.048,23.612 46.023,23.618 45.988,23.628 45.963,23.634 45.91,23.643 45.832,23.646 45.813,23.64 45.767,23.631 45.726,23.615 45.701,23.609 45.67,23.596 45.648,23.574 45.642,23.562 45.604,23.537 45.576,23.503 45.542,23.468 45.532,23.428 45.485,23.337 45.479,23.312 45.473,23.187 45.467,23.168 45.457,23.115 45.448,22.931 45.445,22.878 45.448,22.787 45.442,22.769 45.448,22.706 45.476,22.672 45.495,22.666 45.52,22.659 46.276,22.666 46.297,22.681 46.31,22.712 46.304,23.181 46.297,23.2 46.297,23.225
  region: 47.85,14.427 47.843,14.508 47.834,14.53 47.803,14.574 47.793,14.608 47.762,14.658 47.728,14.692 47.722,14.705 47.7,14.727 47.687,14.733 47.675,14.745 47.644,14.764 47.622,14.786 47.619,14.795 47.587,14.808 47.531,14.814 47.5,14.827 47.475,14.833 47.431,14.839 47.341,14.842 47.259,14.836 47.234,14.83 47.181,14.814 47.144,14.808 47.1,14.777 47.081,14.758 47.056,14.752 47.025,14.733 46.972,14.68 46.96,14.649 46.938,14.627 46.916,14.617 46.91,14.592 46.903,14.542 46.891,14.511 46.878,14.467 46.847,14.386 46.853,13.999 46.863,13.99 47.856,13.996 47.872,14.03 47.865,14.374 47.859,14.393 47.853,14.424
  region: 47.078,22.969 47.072,22.925 47.066,22.825 47.072,22.706 47.1,22.672 47.15,22.659 47.244,22.666 47.263,22.659 47.734,22.663 47.793,22.659 47.812,22.666 47.837,22.672 47.865,22.7 47.872,22.762 47.865,22.969 47.859,22.987 47.84,23.056 47.834,23.1 47.825,23.14 47.809,23.162 47.784,23.187 47.756,23.24 47.743,23.247 47.709,23.275 47.694,23.297 47.662,23.309 47.584,23.337 47.55,23.346 47.506,23.353 47.394,23.346 47.337,23.321 47.288,23.309 47.256,23.297 47.222,23.268 47.2,23.247 47.188,23.24 47.172,23.231 47.166,23.218 47.134,23.162 47.11,23.137 47.097,23.087 47.091,23.012 47.078,22.975
  text "V0.1" at 44.438,38.172 h1.02 r270